# Altium PCB Project.PcbDoc (part 4 of 5)
Units mm, origin at the board's own origin, x right, y up, seen from the top; angles counter-clockwise.
Board outline 95 x 65 mm, 6 copper layers (Top Layer, L2 - GND, L3 - PWR, L4 - Sig, L5 - GND, Bottom Layer), stack 1.538 mm thick; 346 components, 317 nets, 1244 pads, 645 vias.
Unrouted connection lines stored in the file: 109.
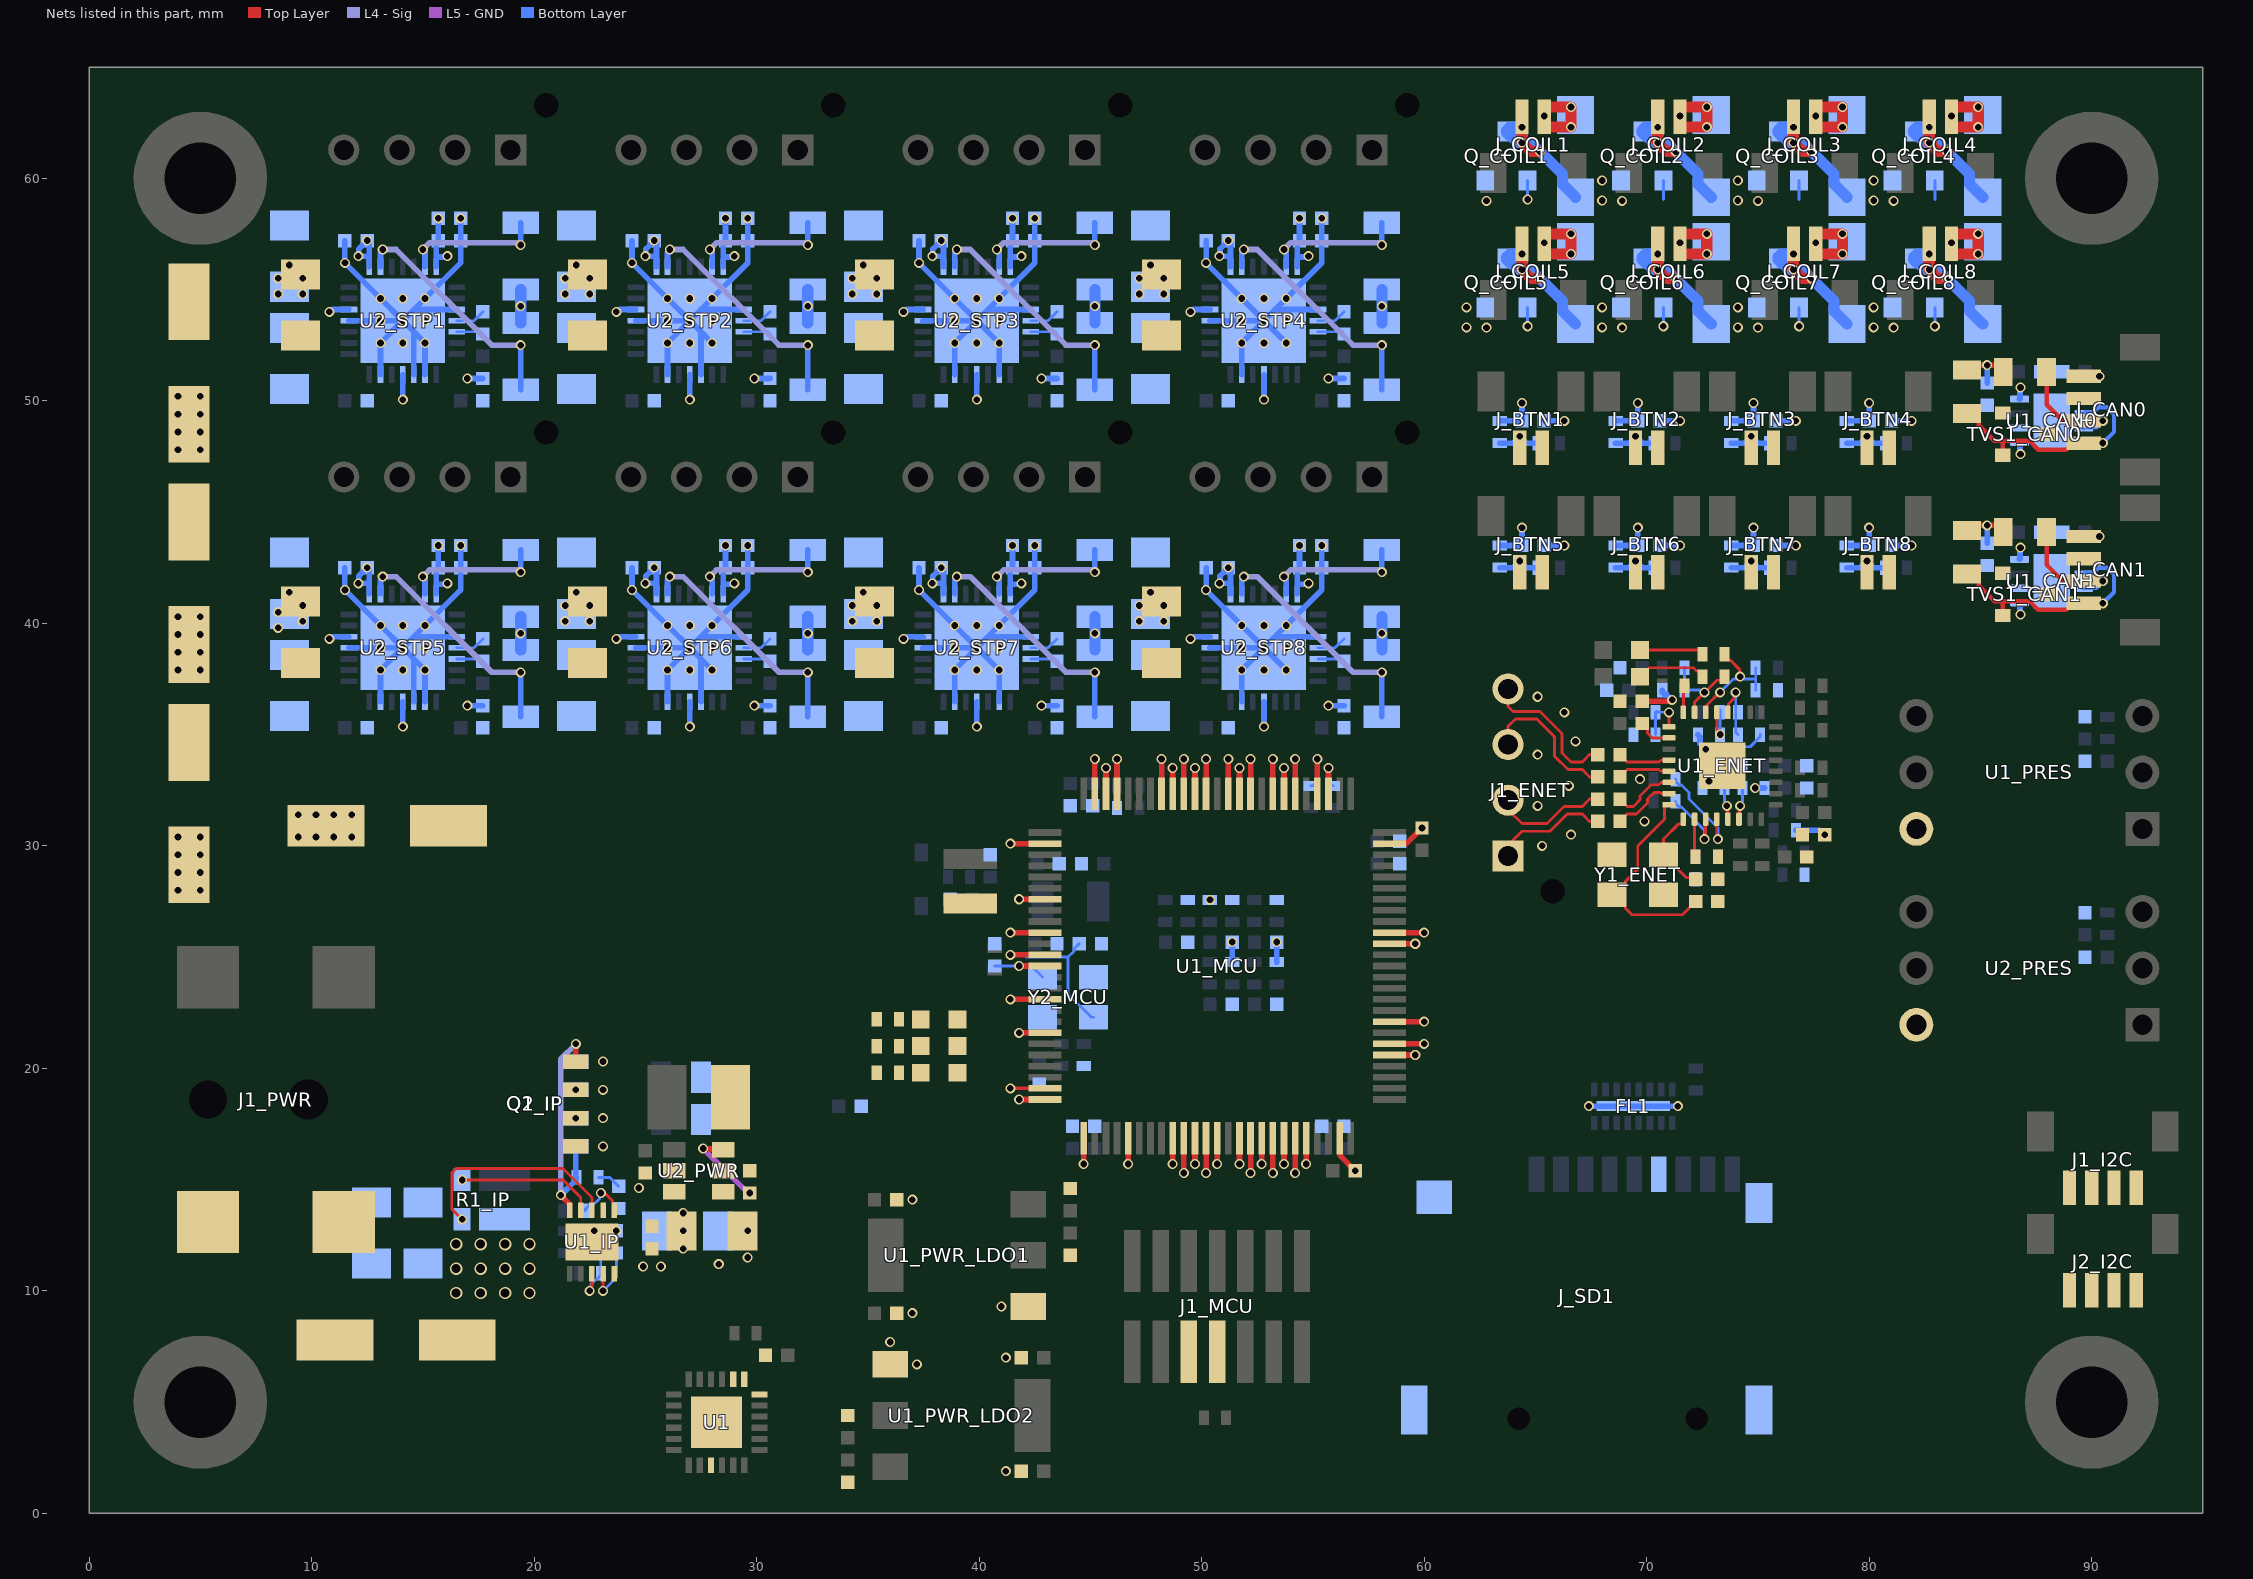
[diagram p6: the nets of this part, all layers, seen from the top]

## Via types
v1: diameter 0.45, hole 0.3, Top Layer to Bottom Layer, tented both sides, 633 vias
v2: diameter 0.55, hole 0.4, Top Layer to Bottom Layer, tented both sides, 12 vias

## Nets (pads, with @x,y where several pads share a name; then routed paths per layer and width w, separated by ;. In a path a pad name is that pad's centre, name@x,y a point inside that pad or via, vN(x,y) a via of type N, cw(c..) or ccw(c..) an arc to the next point about the centre after c; other vN are vias at no path point) (continued)
24V_MAIN: C1_IP.1 C1_STP1.2 C1_STP2.2 C1_STP3.2 C1_STP4.2 C1_STP5.2 C1_STP6.2 C1_STP7.2 C1_STP8.2 C2_IP.2 C2_STP1.2 C2_STP2.2 C2_STP3.2 C2_STP4.2 C2_STP5.2 C2_STP6.2 C2_STP7.2 C2_STP8.2 C3_IP.2 C3_STP1.2 C3_STP2.2 C3_STP3.2 C3_STP4.2 C3_STP5.2 C3_STP6.2 C3_STP7.2 C3_STP8.2 C4_STP1.2 C4_STP2.2 C4_STP3.2 C4_STP4.2 C4_STP5.2 C4_STP6.2 C4_STP7.2 C4_STP8.2 C8_STP1.2 C8_STP2.2 C8_STP3.2 C8_STP4.2 C8_STP5.2 C8_STP6.2 C8_STP7.2 C8_STP8.2 C9_PWR.1 C9_STP1.2 C9_STP2.2 C9_STP3.2 C9_STP4.2 C9_STP5.2 C9_STP6.2 C9_STP7.2 C9_STP8.2 C10_PWR.2 C10_STP1.2 C10_STP2.2 C10_STP3.2 C10_STP4.2 C10_STP5.2 C10_STP6.2 C10_STP7.2 C10_STP8.2 C11_PWR.2 C17_PWR.1 C18_PWR.1 C19_PWR.1 C20_PWR.1 D_COIL1.1 D_COIL2.1 D_COIL3.1 D_COIL4.1 D_COIL5.1 D_COIL6.1 D_COIL7.1 D_COIL8.1 J1_I2C.1 J2_I2C.1 J_CAN0.1 J_CAN1.1 J_COIL1.1 J_COIL2.1 J_COIL3.1 J_COIL4.1 J_COIL5.1 J_COIL6.1 J_COIL7.1 J_COIL8.1 R1_IP.2 R2_PWR.2 U2_PWR.2 U2_PWR.3 U2_STP1.22 U2_STP1.28 U2_STP2.22 U2_STP2.28 U2_STP3.22 U2_STP3.28 U2_STP4.22 U2_STP4.28 U2_STP5.22 U2_STP5.28 U2_STP6.22 U2_STP6.28 U2_STP7.22 U2_STP7.28 U2_STP8.22 U2_STP8.28 | length 81.8
  Top Layer w0.127: J_CAN0.1@89.637,51.1 v1(90.352,51.1)
  Top Layer w0.5: J_COIL5.1@65.4,56.65 65.4,57.45 65.45,57.5 v1(66.6,57.5) v1(66.6,56.6) 65.45,56.6 J_COIL5.1@65.4,56.65 ; J_COIL1.1@65.4,62.35 65.45,62.3 v1(66.6,62.3) v1(66.6,63.2) 65.45,63.2 65.4,63.15 J_COIL1.1@65.4,62.35 ; J_COIL6.1@71.5,56.65 71.55,56.6 v1(72.7,56.6) v1(72.7,57.5) 71.55,57.5 71.5,57.45 J_COIL6.1@71.5,56.65 ; J_COIL2.1@71.5,62.35 71.55,62.3 v1(72.7,62.3) v1(72.7,63.2) 71.55,63.2 71.5,63.15 J_COIL2.1@71.5,62.35 ; J_COIL7.1@77.6,56.65 77.6,57.45 77.65,57.5 v1(78.8,57.5) v1(78.8,56.6) 77.65,56.6 J_COIL7.1@77.6,56.65 ; J_COIL3.1@77.6,62.35 77.6,63.15 77.65,63.2 v1(78.8,63.2) v1(78.8,62.3) 77.65,62.3 J_COIL3.1@77.6,62.35 ; J_COIL8.1@83.7,56.65 83.75,56.6 v1(84.9,56.6) v1(84.9,57.5) 83.75,57.5 83.7,57.45 J_COIL8.1@83.7,56.65 ; J_COIL4.1@83.7,62.35 83.7,63.15 83.75,63.2 v1(84.9,63.2) v1(84.9,62.3) 83.75,62.3 J_COIL4.1@83.7,62.35
  Bottom Layer w0.254: v1(12.1,41.8) 12.6,41.8 ; v1@12.1,41.82 12.125,41.844 12.125,42.125 v1(12.5,42.5) 12.6,42.4 12.6,41.8 ; v1(12.1,56.5) 12.6,56.5 ; v1@12.1,56.52 12.125,56.544 12.125,56.825 v1(12.5,57.2) 12.6,57.1 12.6,56.5 ; U2_STP5.22@12.6,41.323 12.6,41.8 ; U2_STP1.22@12.6,56.023 12.6,56.5 ; U2_STP5.28@15.6,41.323 15.6,41.763 ; U2_STP1.28@15.6,56.023 15.6,56.463 ; v1(15.7,43.5) C2_STP5.2@15.7,42.5 15.6,42.4 15.6,41.763 ; v1(15.7,58.2) C2_STP1.2@15.7,57.2 15.6,57.1 15.6,56.463 ; v1(16.1,41.8) 16.063,41.763 15.6,41.763 ; v1(16.1,56.5) 16.063,56.463 15.6,56.463 ; v1(17,36.3) C4_STP5.2@17.7,36.3 ; v1(17,51) C4_STP1.2@17.7,51 ; v1(25,41.8) 25.5,41.8 ; v1@25,41.82 25.025,41.844 25.025,42.125 v1(25.4,42.5) 25.5,42.4 25.5,41.8 ; v1(25,56.5) 25.5,56.5 ; v1@25,56.52 25.025,56.544 25.025,56.825 v1(25.4,57.2) 25.5,57.1 25.5,56.5 ; U2_STP6.22@25.5,41.323 25.5,41.8 ; U2_STP2.22@25.5,56.023 25.5,56.5 ; U2_STP6.28@28.5,41.323 28.5,41.763 ; U2_STP2.28@28.5,56.023 28.5,56.463 ; v1(28.6,43.5) C2_STP6.2@28.6,42.5 28.5,42.4 28.5,41.763 ; v1(28.6,58.2) C2_STP2.2@28.6,57.2 28.5,57.1 28.5,56.463 ; v1(29,41.8) 28.963,41.763 28.5,41.763 ; v1(29,56.5) 28.963,56.463 28.5,56.463 ; v1(29.9,36.3) C4_STP6.2@30.6,36.3 ; v1(29.9,51) C4_STP2.2@30.6,51 ; v1(37.9,41.8) 38.4,41.8 ; v1@37.9,41.82 37.925,41.844 37.925,42.125 v1(38.3,42.5) 38.4,42.4 38.4,41.8 ; v1(37.9,56.5) 38.4,56.5 ; v1@37.9,56.52 37.925,56.544 37.925,56.825 v1(38.3,57.2) 38.4,57.1 38.4,56.5 ; U2_STP7.22@38.4,41.323 38.4,41.8 ; U2_STP3.22@38.4,56.023 38.4,56.5 ; U2_STP7.28@41.4,41.323 41.4,41.763 ; U2_STP3.28@41.4,56.023 41.4,56.463 ; v1(41.5,43.5) C2_STP7.2@41.5,42.5 41.4,42.4 41.4,41.763 ; v1(41.5,58.2) C2_STP3.2@41.5,57.2 41.4,57.1 41.4,56.463 ; v1(41.9,41.8) 41.863,41.763 41.4,41.763 ; v1(41.9,56.5) 41.863,56.463 41.4,56.463 ; v1(42.8,36.3) C4_STP7.2@43.5,36.3 ; v1(42.8,51) C4_STP3.2@43.5,51 ; v1(50.8,41.8) 51.3,41.8 ; v1@50.8,41.82 50.825,41.844 50.825,42.125 v1(51.2,42.5) 51.3,42.4 51.3,41.8 ; v1(50.8,56.5) 51.3,56.5 ; v1@50.8,56.52 50.825,56.544 50.825,56.825 v1(51.2,57.2) 51.3,57.1 51.3,56.5 ; U2_STP8.22@51.3,41.323 51.3,41.8 ; U2_STP4.22@51.3,56.023 51.3,56.5 ; U2_STP8.28@54.3,41.323 54.3,41.763 ; U2_STP4.28@54.3,56.023 54.3,56.463 ; v1(54.4,43.5) C2_STP8.2@54.4,42.5 54.3,42.4 54.3,41.763 ; v1(54.4,58.2) C2_STP4.2@54.4,57.2 54.3,57.1 54.3,56.463 ; v1(54.8,41.8) 54.763,41.763 54.3,41.763 ; v1(54.8,56.5) 54.763,56.463 54.3,56.463 ; v1(55.7,36.3) C4_STP8.2@56.4,36.3 ; v1(55.7,51) C4_STP4.2@56.4,51
  other v1: 26.7,11.9 26.7,12.7 26.7,13.5 50.375,27.575 4,28 5,28 4,28.8 5,28.8 4,29.6 5,29.6 4,30.4 5,30.4 9.4,30.4 10.2,30.4 11,30.4 11.8,30.4 9.4,31.4 10.2,31.4 11,31.4 11.8,31.4 4,37.9 5,37.9 4,38.7 5,38.7 4,39.5 5,39.5 8.5,39.8 9.6,40.1 21.4,40.1 22.5,40.1 34.3,40.1 35.4,40.1 47.2,40.1 48.3,40.1 4,40.3 5,40.3 8.5,40.5 9.6,40.8 21.4,40.8 22.5,40.8 34.3,40.8 35.4,40.8 47.2,40.8 48.3,40.8 9,41.4 21.9,41.4 34.8,41.4 47.7,41.4 90.352,43.9 4,47.8 5,47.8 4,48.6 5,48.6 4,49.4 5,49.4 4,50.2 5,50.2 8.5,54.8 9.6,54.8 21.4,54.8 22.5,54.8 34.3,54.8 35.4,54.8 47.2,54.8 48.3,54.8 8.5,55.5 9.6,55.5 21.4,55.5 22.5,55.5 34.3,55.5 35.4,55.5 47.2,55.5 48.3,55.5 9,56.1 21.9,56.1 34.8,56.1 47.7,56.1 65.4,57.1 71.5,57.1 77.6,57.1 83.7,57.1 65.4,62.8 71.5,62.8 77.6,62.8 83.7,62.8
  other v2: 16.5,9.9 17.6,9.9 18.7,9.9 19.8,9.9 16.5,11 17.6,11 18.7,11 19.8,11 16.5,12.1 17.6,12.1 18.7,12.1 19.8,12.1
ALARM_X: U1_MCU.44 | length 1.2
  Top Layer w0.254: v1(53.7,15.7) U1_MCU.44@53.7,16.862
ALARM_Y: U1_MCU.45 | length 1.6
  Top Layer w0.254: v1(54.2,15.3) U1_MCU.45@54.2,16.862
BRA_STP1: R1_STP1.1 U2_STP1.23 | length 10.8
  L4 - Sig w0.254: v1(13.2,56.8) 13.8,56.8 18.1,52.5 v1(19.4,52.5)
  Bottom Layer w0.254: U2_STP1.23@13.1,56.023 13.1,56.647 13.2,56.747 v1(13.2,56.8) ; R1_STP1.1@19.4,50.5 v1(19.4,52.5)
BRA_STP2: R1_STP2.1 U2_STP2.23 | length 10.8
  L4 - Sig w0.254: v1(26.1,56.8) 26.7,56.8 31,52.5 v1(32.3,52.5)
  Bottom Layer w0.254: U2_STP2.23@26,56.023 26,56.647 26.1,56.747 v1(26.1,56.8) ; R1_STP2.1@32.3,50.5 v1(32.3,52.5)
BRA_STP3: R1_STP3.1 U2_STP3.23 | length 10.8
  L4 - Sig w0.254: v1(39,56.8) 39.6,56.8 43.9,52.5 v1(45.2,52.5)
  Bottom Layer w0.254: U2_STP3.23@38.9,56.023 38.9,56.647 39,56.747 v1(39,56.8) ; R1_STP3.1@45.2,50.5 v1(45.2,52.5)
BRA_STP4: R1_STP4.1 U2_STP4.23 | length 10.8
  L4 - Sig w0.254: v1(51.9,56.8) 52.5,56.8 56.8,52.5 v1(58.1,52.5)
  Bottom Layer w0.254: U2_STP4.23@51.8,56.023 51.8,56.647 51.9,56.747 v1(51.9,56.8) ; R1_STP4.1@58.1,50.5 v1(58.1,52.5)
BRA_STP5: R1_STP5.1 U2_STP5.23 | length 10.8
  L4 - Sig w0.254: v1(13.2,42.1) 13.8,42.1 18.1,37.8 v1(19.4,37.8)
  Bottom Layer w0.254: U2_STP5.23@13.1,41.323 13.1,41.947 13.2,42.047 v1(13.2,42.1) ; R1_STP5.1@19.4,35.8 v1(19.4,37.8)
BRA_STP6: R1_STP6.1 U2_STP6.23 | length 10.8
  L4 - Sig w0.254: v1(26.1,42.1) 26.7,42.1 31,37.8 v1(32.3,37.8)
  Bottom Layer w0.254: U2_STP6.23@26,41.323 26,41.947 26.1,42.047 v1(26.1,42.1) ; R1_STP6.1@32.3,35.8 v1(32.3,37.8)
BRA_STP7: R1_STP7.1 U2_STP7.23 | length 10.8
  L4 - Sig w0.254: v1(39,42.1) 39.6,42.1 43.9,37.8 v1(45.2,37.8)
  Bottom Layer w0.254: U2_STP7.23@38.9,41.323 38.9,41.947 39,42.047 v1(39,42.1) ; R1_STP7.1@45.2,35.8 v1(45.2,37.8)
BRA_STP8: R1_STP8.1 U2_STP8.23 | length 10.8
  L4 - Sig w0.254: v1(51.9,42.1) 52.5,42.1 56.8,37.8 v1(58.1,37.8)
  Bottom Layer w0.254: U2_STP8.23@51.8,41.323 51.8,41.947 51.9,42.047 v1(51.9,42.1) ; R1_STP8.1@58.1,35.8 v1(58.1,37.8)
BRB_STP1: R2_STP1.1 U2_STP1.27 | length 6.4
  L4 - Sig w0.254: v1(15,56.8) 15.3,57.1 19.247,57.1 19.347,57 v1(19.4,57)
  Bottom Layer w0.254: v1(15,56.8) 15,56.747 15.1,56.647 U2_STP1.27@15.1,56.023 ; v1(19.4,57) R2_STP1.1@19.4,58
BRB_STP2: R2_STP2.1 U2_STP2.27 | length 6.4
  L4 - Sig w0.254: v1(27.9,56.8) 28.2,57.1 32.147,57.1 32.247,57 v1(32.3,57)
  Bottom Layer w0.254: v1(27.9,56.8) 27.9,56.747 28,56.647 U2_STP2.27@28,56.023 ; v1(32.3,57) R2_STP2.1@32.3,58
BRB_STP3: R2_STP3.1 U2_STP3.27 | length 6.4
  L4 - Sig w0.254: v1(40.8,56.8) 41.1,57.1 45.047,57.1 45.147,57 v1(45.2,57)
  Bottom Layer w0.254: v1(40.8,56.8) 40.8,56.747 40.9,56.647 U2_STP3.27@40.9,56.023 ; v1(45.2,57) R2_STP3.1@45.2,58
BRB_STP4: R2_STP4.1 U2_STP4.27 | length 6.4
  L4 - Sig w0.254: v1(53.7,56.8) 54,57.1 57.947,57.1 58.047,57 v1(58.1,57)
  Bottom Layer w0.254: v1(53.7,56.8) 53.7,56.747 53.8,56.647 U2_STP4.27@53.8,56.023 ; v1(58.1,57) R2_STP4.1@58.1,58
BRB_STP5: R2_STP5.1 U2_STP5.27 | length 6.4
  L4 - Sig w0.254: v1(15,42.1) 15.3,42.4 19.247,42.4 19.347,42.3 v1(19.4,42.3)
  Bottom Layer w0.254: v1(15,42.1) 15,42.047 15.1,41.947 U2_STP5.27@15.1,41.323 ; v1(19.4,42.3) R2_STP5.1@19.4,43.3
BRB_STP6: R2_STP6.1 U2_STP6.27 | length 6.4
  L4 - Sig w0.254: v1(27.9,42.1) 28.2,42.4 32.147,42.4 32.247,42.3 v1(32.3,42.3)
  Bottom Layer w0.254: v1(27.9,42.1) 27.9,42.047 28,41.947 U2_STP6.27@28,41.323 ; v1(32.3,42.3) R2_STP6.1@32.3,43.3
BRB_STP7: R2_STP7.1 U2_STP7.27 | length 6.4
  L4 - Sig w0.254: v1(40.8,42.1) 41.1,42.4 45.047,42.4 45.147,42.3 v1(45.2,42.3)
  Bottom Layer w0.254: v1(40.8,42.1) 40.8,42.047 40.9,41.947 U2_STP7.27@40.9,41.323 ; v1(45.2,42.3) R2_STP7.1@45.2,43.3
BRB_STP8: R2_STP8.1 U2_STP8.27 | length 6.4
  L4 - Sig w0.254: v1(53.7,42.1) 54,42.4 57.947,42.4 58.047,42.3 v1(58.1,42.3)
  Bottom Layer w0.254: v1(53.7,42.1) 53.7,42.047 53.8,41.947 U2_STP8.27@53.8,41.323 ; v1(58.1,42.3) R2_STP8.1@58.1,43.3
BTN1: C1_BTN1.2 R2_BTN1.1 | length 1.8
  Bottom Layer w0.254: R2_BTN1.1@63.4,49.1 C1_BTN1.2@64.4,49.1 v1(64.4,49.9)
BTN2: C1_BTN2.2 R2_BTN2.1 | length 1.8
  Bottom Layer w0.254: R2_BTN2.1@68.6,49.1 C1_BTN2.2@69.6,49.1 v1(69.6,49.9)
BTN3: C1_BTN3.2 R2_BTN3.1 | length 1.8
  Bottom Layer w0.254: R2_BTN3.1@73.8,49.1 C1_BTN3.2@74.8,49.1 v1(74.8,49.9)
BTN4: C1_BTN4.2 R2_BTN4.1 | length 1.8
  Bottom Layer w0.254: R2_BTN4.1@79,49.1 C1_BTN4.2@80,49.1 v1(80,49.9)
BTN5: C1_BTN5.2 R2_BTN5.1 | length 1.8
  Bottom Layer w0.254: R2_BTN5.1@63.4,43.5 C1_BTN5.2@64.4,43.5 v1(64.4,44.3)
BTN6: C1_BTN6.2 R2_BTN6.1 | length 1.8
  Bottom Layer w0.254: R2_BTN6.1@68.6,43.5 C1_BTN6.2@69.6,43.5 v1(69.6,44.3)
BTN7: C1_BTN7.2 R2_BTN7.1 | length 1.8
  Bottom Layer w0.254: R2_BTN7.1@73.8,43.5 C1_BTN7.2@74.8,43.5 v1(74.8,44.3)
BTN8: C1_BTN8.2 R2_BTN8.1 | length 1.8
  Bottom Layer w0.254: R2_BTN8.1@79,43.5 C1_BTN8.2@80,43.5 v1(80,44.3)
BTN_R_BTN1: J_BTN1.1 R1_BTN1.1 R2_BTN1.2 | length 1.9
  Bottom Layer w0.254: R2_BTN1.2@63.4,48.1 64,48.1 v1(64.3,48.4) 64.6,48.1 R1_BTN1.1@65.1,48.1
BTN_R_BTN2: J_BTN2.1 R1_BTN2.1 R2_BTN2.2 | length 1.9
  Bottom Layer w0.254: R2_BTN2.2@68.6,48.1 69.2,48.1 v1(69.5,48.4) 69.8,48.1 R1_BTN2.1@70.3,48.1
BTN_R_BTN3: J_BTN3.1 R1_BTN3.1 R2_BTN3.2 | length 1.9
  Bottom Layer w0.254: R2_BTN3.2@73.8,48.1 74.4,48.1 v1(74.7,48.4) 75,48.1 R1_BTN3.1@75.5,48.1
BTN_R_BTN4: J_BTN4.1 R1_BTN4.1 R2_BTN4.2 | length 1.9
  Bottom Layer w0.254: R2_BTN4.2@79,48.1 79.6,48.1 v1(79.9,48.4) 80.2,48.1 R1_BTN4.1@80.7,48.1
BTN_R_BTN5: J_BTN5.1 R1_BTN5.1 R2_BTN5.2 | length 1.9
  Bottom Layer w0.254: R2_BTN5.2@63.4,42.5 64,42.5 v1(64.3,42.8) 64.6,42.5 R1_BTN5.1@65.1,42.5
BTN_R_BTN6: J_BTN6.1 R1_BTN6.1 R2_BTN6.2 | length 1.9
  Bottom Layer w0.254: R2_BTN6.2@68.6,42.5 69.2,42.5 v1(69.5,42.8) 69.8,42.5 R1_BTN6.1@70.3,42.5
BTN_R_BTN7: J_BTN7.1 R1_BTN7.1 R2_BTN7.2 | length 1.9
  Bottom Layer w0.254: R2_BTN7.2@73.8,42.5 74.4,42.5 v1(74.7,42.8) 75,42.5 R1_BTN7.1@75.5,42.5
BTN_R_BTN8: J_BTN8.1 R1_BTN8.1 R2_BTN8.2 | length 1.9
  Bottom Layer w0.254: R2_BTN8.2@79,42.5 79.6,42.5 v1(79.9,42.8) 80.2,42.5 R1_BTN8.1@80.7,42.5
BUCK_5V_BST: C5_PWR.2 U2_PWR.6 | length 3.8
  Top Layer w0.254: v1(27.6,16.4) 27.625,16.375 28.475,16.375 U2_PWR.6@28.5,16.35
  L5 - GND w0.254: v1(27.6,16.4) 29.562,14.438 29.662,14.438 v1(29.7,14.4)
BUCK_5V_SW: C5_PWR.1 L1_PWR.1 U2_PWR.5
CAN0_MCU_TO_PHY_DATA: U1_CAN0.1 U1_MCU.82 | length 1.7
  Top Layer w0.254: U1_MCU.82@53.7,32.338 v1(53.7,33.5)
  Bottom Layer w0.254: U1_CAN0.1@86.755,48.125 86.777,48.103 86.777,47.623 v1(86.8,47.6)
CAN0_PHY_TO_MCU_DATA: U1_CAN0.4 U1_MCU.81 | length 2.1
  Top Layer w0.254: U1_MCU.81@54.2,32.338 v1(54.2,33.9)
  Bottom Layer w0.254: U1_CAN0.4@86.755,50.075 86.777,50.097 86.777,50.577 v1(86.8,50.6)
CAN1_MCU_TO_PHY_DATA: U1_CAN1.1 U1_MCU.92 | length 1.7
  Top Layer w0.254: U1_MCU.92@48.7,32.338 v1(48.7,33.5)
  Bottom Layer w0.254: U1_CAN1.1@86.755,40.925 86.777,40.902 86.777,40.422 v1(86.8,40.4)
CAN1_PHY_TO_MCU_DATA: U1_CAN1.4 U1_MCU.91 | length 2.1
  Top Layer w0.254: U1_MCU.91@49.2,32.338 v1(49.2,33.9)
  Bottom Layer w0.254: U1_CAN1.4@86.755,42.875 86.777,42.897 86.777,43.377 v1(86.8,43.4)
CAN_CAN0_H: J_CAN0.3 R1_CAN0.2 TVS1_CAN0.1 U1_CAN0.7 | length 4.4
  Top Layer w0.2: R1_CAN0.2@87.975,51.3 87.975,49.825 88.68,49.12 89.617,49.12 J_CAN0.3@89.637,49.1
  Bottom Layer w0.2: U1_CAN0.7@89.645,48.775 89.67,48.8 90.2,48.8 v1(90.5,49.1)
CAN_CAN0_L: J_CAN0.4 R2_CAN0.1 TVS1_CAN0.2 U1_CAN0.6 | length 9.9
  Top Layer w0.2: R2_CAN0.1@84.4,49.425 84.6,49.425 84.925,49.1 84.925,48.9 85.625,48.2 86,48.2 ; TVS1_CAN0.2@86,47.55 86,48.2 ; J_CAN0.4@89.637,48.1 89.162,48.1 88.862,47.8 87.6,47.8 87.2,48.2 86,48.2
  Bottom Layer w0.2: U1_CAN0.6@89.645,49.425 89.705,49.485 90.085,49.485 90.3,49.7 90.7,49.7 91,49.4 91,48.6 v1(90.5,48.1)
CAN_CAN1_H: J_CAN1.3 R1_CAN1.2 TVS1_CAN1.1 U1_CAN1.7 | length 4.4
  Top Layer w0.2: R1_CAN1.2@87.975,44.1 87.975,42.625 88.68,41.92 89.617,41.92 J_CAN1.3@89.637,41.9
  Bottom Layer w0.2: U1_CAN1.7@89.645,41.575 89.67,41.6 90.2,41.6 v1(90.5,41.9)
CAN_CAN1_L: J_CAN1.4 R2_CAN1.1 TVS1_CAN1.2 U1_CAN1.6 | length 9.9
  Top Layer w0.2: R2_CAN1.1@84.4,42.225 84.6,42.225 84.925,41.9 84.925,41.7 85.625,41 86,41 ; TVS1_CAN1.2@86,40.35 86,41 ; J_CAN1.4@89.637,40.9 89.162,40.9 88.862,40.6 87.6,40.6 87.2,41 86,41
  Bottom Layer w0.2: U1_CAN1.6@89.645,42.225 89.705,42.285 90.085,42.285 90.3,42.5 90.7,42.5 91,42.2 91,41.4 v1(90.5,40.9)
CAN_TERM_CAN0: C3_CAN0.2 R1_CAN0.1 R2_CAN0.2 | length 2.6
  Top Layer w0.254: R2_CAN0.2@84.4,51.375 84.625,51.6 v1(85.3,51.6) 85.727,51.6 86.025,51.302 R1_CAN0.1@86.025,51.3
  Bottom Layer w0.254: C3_CAN0.2@85.3,50.8 v1(85.3,51.6)
CAN_TERM_CAN1: C3_CAN1.2 R1_CAN1.1 R2_CAN1.2 | length 2.6
  Top Layer w0.254: R2_CAN1.2@84.4,44.175 84.625,44.4 v1(85.3,44.4) 85.727,44.4 86.025,44.102 R1_CAN1.1@86.025,44.1
  Bottom Layer w0.254: C3_CAN1.2@85.3,43.6 v1(85.3,44.4)
CLK_25M_MCU_XI: C5_MCU.2 U1_MCU.12 Y2_MCU.1 | length 8.2
  Top Layer w0.254: v1(41.4,25.1) U1_MCU.12@42.962,25.1
  Bottom Layer w0.127: v1(41.4,25.1) 42,25.1 42.1,25 44,25 ; C5_MCU.2@44.5,25.6 44.264,25.364 44.264,25.263 44,25 ; Y2_MCU.1@45.15,22.3 45.05,22.3 44,23.35 44,25
CLK_25M_MCU_XO: C4_MCU.2 U1_MCU.13 Y2_MCU.3 | length 3.5
  Top Layer w0.254: v1(41.8,24.6) U1_MCU.13@42.962,24.6
  Bottom Layer w0.127: C4_MCU.2@40.7,24.6 v1(41.8,24.6) 42.189,24.6 42.203,24.587 42.363,24.587 Y2_MCU.3@42.85,24.1
COIL_EN1: Q_COIL1.1 | length 0.9
  Bottom Layer w0.127: v1(64.65,59.05) Q_COIL1.1@64.65,59.9
COIL_EN2: Q_COIL2.1 | length 0.9
  Bottom Layer w0.127: 70.75,59.05 Q_COIL2.1@70.75,59.9
COIL_EN3: Q_COIL3.1 | length 0.9
  Bottom Layer w0.127: 76.85,59.05 Q_COIL3.1@76.85,59.9
COIL_EN4: Q_COIL4.1 | length 0.9
  Bottom Layer w0.127: 82.95,59.05 Q_COIL4.1@82.95,59.9
COIL_EN5: Q_COIL5.1 | length 0.9
  Bottom Layer w0.127: v1(64.65,53.35) Q_COIL5.1@64.65,54.2
COIL_EN6: Q_COIL6.1 | length 0.9
  Bottom Layer w0.127: v1(70.75,53.35) Q_COIL6.1@70.75,54.2
COIL_EN7: Q_COIL7.1 | length 0.9
  Bottom Layer w0.127: v1(76.85,53.35) Q_COIL7.1@76.85,54.2
COIL_EN8: Q_COIL8.1 | length 0.9
  Bottom Layer w0.127: v1(82.95,53.35) Q_COIL8.1@82.95,54.2
COIL_LO_COIL1: D_COIL1.2 J_COIL1.2 Q_COIL1.3 | length 8.3
  Top Layer w0.254: v1(64.4,62.3) J_COIL1.2@64.4,62.763
  Top Layer w0.5: v1(64.4,62.3) v1(64.4,61.6) 64.8,61.2 v1(65.2,61.2)
  Bottom Layer w0.5: D_COIL1.2@66.8,59.15 66.21,59.74 66.21,60.19 v1(65.2,61.2) 64.8,61.6 v1(64.4,61.6) ; v1(64.4,61.6) 64.2,61.6 63.9,61.9 63.85,61.9 63.7,62.05 Q_COIL1.3@63.7,62.1 63.7,62.15 63.85,62.3 v1(64.4,62.3) v1(64.4,61.6)
COIL_LO_COIL2: D_COIL2.2 J_COIL2.2 Q_COIL2.3 | length 8.3
  Top Layer w0.254: v1(70.5,62.3) J_COIL2.2@70.5,62.762
  Top Layer w0.5: v1(70.5,62.3) v1(70.5,61.6) 70.9,61.2 v1(71.3,61.2)
  Bottom Layer w0.5: D_COIL2.2@72.9,59.15 72.31,59.74 72.31,60.19 v1(71.3,61.2) 70.9,61.6 v1(70.5,61.6) ; v1(70.5,61.6) v1(70.5,62.3) 69.95,62.3 69.8,62.15 Q_COIL2.3@69.8,62.1 69.8,62.05 69.95,61.9 70,61.9 70.3,61.6 v1(70.5,61.6)
COIL_LO_COIL3: D_COIL3.2 J_COIL3.2 Q_COIL3.3 | length 8.3
  Top Layer w0.254: v1(76.6,62.3) J_COIL3.2@76.6,62.763
  Top Layer w0.5: v1(76.6,62.3) v1(76.6,61.6) 77,61.2 v1(77.4,61.2)
  Bottom Layer w0.5: D_COIL3.2@79,59.15 78.41,59.74 78.41,60.19 v1(77.4,61.2) 77,61.6 v1(76.6,61.6) ; v1(76.6,61.6) v1(76.6,62.3) 76.05,62.3 75.9,62.15 Q_COIL3.3@75.9,62.1 75.9,62.05 76.05,61.9 76.1,61.9 76.4,61.6 v1(76.6,61.6)
COIL_LO_COIL4: D_COIL4.2 J_COIL4.2 Q_COIL4.3 | length 8.3
  Top Layer w0.254: v1(82.7,62.3) J_COIL4.2@82.7,62.763
  Top Layer w0.5: v1(82.7,62.3) v1(82.7,61.6) 83.1,61.2 v1(83.5,61.2)
  Bottom Layer w0.5: D_COIL4.2@85.1,59.15 84.51,59.74 84.51,60.19 v1(83.5,61.2) 83.1,61.6 v1(82.7,61.6) ; v1(82.7,61.6) v1(82.7,62.3) 82.15,62.3 82,62.15 Q_COIL4.3@82,62.1 82,62.05 82.15,61.9 82.2,61.9 82.5,61.6 v1(82.7,61.6)
COIL_LO_COIL5: D_COIL5.2 J_COIL5.2 Q_COIL5.3 | length 8.3
  Top Layer w0.254: v1(64.4,56.6) J_COIL5.2@64.4,57.063
  Top Layer w0.5: v1(64.4,56.6) v1(64.4,55.9) 64.8,55.5 v1(65.2,55.5)
  Bottom Layer w0.5: D_COIL5.2@66.8,53.45 66.21,54.04 66.21,54.49 v1(65.2,55.5) 64.8,55.9 v1(64.4,55.9) ; v1(64.4,55.9) v1(64.4,56.6) 63.85,56.6 63.7,56.45 Q_COIL5.3@63.7,56.4 63.7,56.35 63.85,56.2 63.9,56.2 64.2,55.9 v1(64.4,55.9)
COIL_LO_COIL6: D_COIL6.2 J_COIL6.2 Q_COIL6.3 | length 8.3
  Top Layer w0.254: v1(70.5,56.6) J_COIL6.2@70.5,57.063
  Top Layer w0.5: v1(70.5,56.6) v1(70.5,55.9) 70.9,55.5 v1(71.3,55.5)
  Bottom Layer w0.5: D_COIL6.2@72.9,53.45 72.31,54.04 72.31,54.49 v1(71.3,55.5) 70.9,55.9 v1(70.5,55.9) ; v1(70.5,55.9) v1(70.5,56.6) 69.95,56.6 69.8,56.45 Q_COIL6.3@69.8,56.4 69.8,56.35 69.95,56.2 70,56.2 70.3,55.9 v1(70.5,55.9)
COIL_LO_COIL7: D_COIL7.2 J_COIL7.2 Q_COIL7.3 | length 8.3
  Top Layer w0.254: v1(76.6,56.6) J_COIL7.2@76.6,57.063
  Top Layer w0.5: v1(76.6,56.6) v1(76.6,55.9) 77,55.5 v1(77.4,55.5)
  Bottom Layer w0.5: D_COIL7.2@79,53.45 78.41,54.04 78.41,54.49 v1(77.4,55.5) 77,55.9 v1(76.6,55.9) ; v1(76.6,55.9) v1(76.6,56.6) 76.05,56.6 75.9,56.45 Q_COIL7.3@75.9,56.4 75.9,56.35 76.05,56.2 76.1,56.2 76.4,55.9 v1(76.6,55.9)
COIL_LO_COIL8: D_COIL8.2 J_COIL8.2 Q_COIL8.3 | length 8.3
  Top Layer w0.254: v1(82.7,56.6) J_COIL8.2@82.7,57.063
  Top Layer w0.5: v1(82.7,56.6) v1(82.7,55.9) 83.1,55.5 v1(83.5,55.5)
  Bottom Layer w0.5: D_COIL8.2@85.1,53.45 84.51,54.04 84.51,54.49 v1(83.5,55.5) 83.1,55.9 v1(82.7,55.9) ; v1(82.7,55.9) v1(82.7,56.6) 82.15,56.6 82,56.45 Q_COIL8.3@82,56.4 82,56.35 82.15,56.2 82.2,56.2 82.5,55.9 v1(82.7,55.9)
CPI_STP1: C7_STP1.1 U2_STP1.5 | length 1.2
  Bottom Layer w0.127: U2_STP1.5@16.523,53.1 17.6,53.1 C7_STP1.1@17.7,53
CPI_STP2: C7_STP2.1 U2_STP2.5 | length 1.2
  Bottom Layer w0.127: U2_STP2.5@29.423,53.1 30.5,53.1 C7_STP2.1@30.6,53
CPI_STP3: C7_STP3.1 U2_STP3.5 | length 1.2
  Bottom Layer w0.127: U2_STP3.5@42.323,53.1 43.4,53.1 C7_STP3.1@43.5,53
CPI_STP4: C7_STP4.1 U2_STP4.5 | length 1.2
  Bottom Layer w0.127: U2_STP4.5@55.223,53.1 56.3,53.1 C7_STP4.1@56.4,53
CPI_STP5: C7_STP5.1 U2_STP5.5 | length 1.2
  Bottom Layer w0.127: U2_STP5.5@16.523,38.4 17.6,38.4 C7_STP5.1@17.7,38.3
CPI_STP6: C7_STP6.1 U2_STP6.5 | length 1.2
  Bottom Layer w0.127: U2_STP6.5@29.423,38.4 30.5,38.4 C7_STP6.1@30.6,38.3
CPI_STP7: C7_STP7.1 U2_STP7.5 | length 1.2
  Bottom Layer w0.127: U2_STP7.5@42.323,38.4 43.4,38.4 C7_STP7.1@43.5,38.3
CPI_STP8: C7_STP8.1 U2_STP8.5 | length 1.2
  Bottom Layer w0.127: U2_STP8.5@55.223,38.4 56.3,38.4 C7_STP8.1@56.4,38.3
CPO_STP1: C7_STP1.2 U2_STP1.4 | length 1.3
  Bottom Layer w0.127: U2_STP1.4@16.523,53.6 17.3,53.6 C7_STP1.2@17.7,54
CPO_STP2: C7_STP2.2 U2_STP2.4 | length 1.3
  Bottom Layer w0.127: U2_STP2.4@29.423,53.6 30.2,53.6 C7_STP2.2@30.6,54
CPO_STP3: C7_STP3.2 U2_STP3.4 | length 1.3
  Bottom Layer w0.127: U2_STP3.4@42.323,53.6 43.1,53.6 C7_STP3.2@43.5,54
CPO_STP4: C7_STP4.2 U2_STP4.4 | length 1.3
  Bottom Layer w0.127: U2_STP4.4@55.223,53.6 56,53.6 C7_STP4.2@56.4,54
CPO_STP5: C7_STP5.2 U2_STP5.4 | length 1.3
  Bottom Layer w0.127: U2_STP5.4@16.523,38.9 17.3,38.9 C7_STP5.2@17.7,39.3
CPO_STP6: C7_STP6.2 U2_STP6.4 | length 1.3
  Bottom Layer w0.127: U2_STP6.4@29.423,38.9 30.2,38.9 C7_STP6.2@30.6,39.3
CPO_STP7: C7_STP7.2 U2_STP7.4 | length 1.3
  Bottom Layer w0.127: U2_STP7.4@42.323,38.9 43.1,38.9 C7_STP7.2@43.5,39.3
CPO_STP8: C7_STP8.2 U2_STP8.4 | length 1.3
  Bottom Layer w0.127: U2_STP8.4@55.223,38.9 56,38.9 C7_STP8.2@56.4,39.3
DEBUG_LED_0: R10_MCU.1
DEBUG_LED_0_R: D2_MCU.2 R10_MCU.2
DEBUG_LED_1: R11_MCU.1
DEBUG_LED_1_R: D3_MCU.2 R11_MCU.2
DEBUG_LED_2: R12_MCU.1
DEBUG_LED_2_R: D4_MCU.2 R12_MCU.2
DIAG1: U2_STP1.11 | length 1.1
  Bottom Layer w0.254: v1(14.1,50.053) U2_STP1.11@14.1,51.177
DIAG2: U2_STP2.11 | length 1.1
  Bottom Layer w0.254: v1(27,50.053) U2_STP2.11@27,51.177
DIAG3: U2_STP3.11 | length 1.1
  Bottom Layer w0.254: v1(39.9,50.053) U2_STP3.11@39.9,51.177
DIAG4: U2_STP4.11 | length 1.1
  Bottom Layer w0.254: v1(52.8,50.053) U2_STP4.11@52.8,51.177
DIAG5: U2_STP5.11 | length 1.1
  Bottom Layer w0.254: v1(14.1,35.353) U2_STP5.11@14.1,36.477
DIAG6: U2_STP6.11 | length 1.1
  Bottom Layer w0.254: v1(27,35.353) U2_STP6.11@27,36.477
DIAG7: U2_STP7.11 | length 1.1
  Bottom Layer w0.254: v1(39.9,35.353) U2_STP7.11@39.9,36.477
DIAG8: U2_STP8.11 | length 1.1
  Bottom Layer w0.254: v1(52.8,35.353) U2_STP8.11@52.8,36.477
DIAG_AUX: U1_MCU.93 | length 1.6
  Top Layer w0.254: U1_MCU.93@48.2,32.338 v1(48.2,33.9)
DIAG_R1: U1_MCU.86 | length 1.2
  Top Layer w0.254: U1_MCU.86@51.7,32.338 v1(51.7,33.5)
DIAG_R2: U1_MCU.87 | length 1.6
  Top Layer w0.254: U1_MCU.87@51.2,32.338 v1(51.2,33.9)
DIAG_X: U1_MCU.34 | length 1.2
  Top Layer w0.254: v1(48.7,15.7) U1_MCU.34@48.7,16.862
DIAG_Y1: U1_MCU.35 | length 1.6
  Top Layer w0.254: v1(49.2,15.3) U1_MCU.35@49.2,16.862
DIAG_Y2: U1_MCU.36 | length 1.2
  Top Layer w0.254: v1(49.7,15.7) U1_MCU.36@49.7,16.862
DIAG_Z1: U1_MCU.89 | length 1.6
  Top Layer w0.254: U1_MCU.89@50.2,32.338 v1(50.2,33.9)
DIAG_Z2: U1_MCU.90 | length 1.2
  Top Layer w0.254: U1_MCU.90@49.7,32.338 v1(49.7,33.5)
DIR1: U2_STP1.19 | length 0.9
  Bottom Layer w0.254: v1(10.8,54) 10.853,54 10.953,54.1 U2_STP1.19@11.677,54.1
DIR2: U2_STP2.19 | length 0.9
  Bottom Layer w0.254: v1(23.7,54) 23.753,54 23.853,54.1 U2_STP2.19@24.577,54.1
DIR3: U2_STP3.19 | length 0.9
  Bottom Layer w0.254: v1(36.6,54) 36.653,54 36.753,54.1 U2_STP3.19@37.477,54.1
DIR4: U2_STP4.19 | length 0.9
  Bottom Layer w0.254: v1(49.5,54) 49.553,54 49.653,54.1 U2_STP4.19@50.377,54.1
DIR5: U2_STP5.19 | length 0.9
  Bottom Layer w0.254: v1(10.8,39.3) 10.853,39.3 10.953,39.4 U2_STP5.19@11.677,39.4
DIR6: U2_STP6.19 | length 0.9
  Bottom Layer w0.254: v1(23.7,39.3) 23.753,39.3 23.853,39.4 U2_STP6.19@24.577,39.4
DIR7: U2_STP7.19 | length 0.9
  Bottom Layer w0.254: v1(36.6,39.3) 36.653,39.3 36.753,39.4 U2_STP7.19@37.477,39.4
DIR8: U2_STP8.19 | length 0.9
  Bottom Layer w0.254: v1(49.5,39.3) 49.553,39.3 49.653,39.4 U2_STP8.19@50.377,39.4
DIR_AUX: U1_MCU.43 | length 1.6
  Top Layer w0.254: v1(53.2,15.3) U1_MCU.43@53.2,16.862
DIR_R1: U1_MCU.40 | length 1.2
  Top Layer w0.254: v1(51.7,15.7) U1_MCU.40@51.7,16.862
DIR_R2: U1_MCU.41 | length 1.6
  Top Layer w0.254: v1(52.2,15.3) U1_MCU.41@52.2,16.862
DIR_X: U1_MCU.97 | length 1.6
  Top Layer w0.254: U1_MCU.97@46.2,32.338 v1(46.2,33.9)
DIR_Y1: U1_MCU.98 | length 1.2
  Top Layer w0.254: U1_MCU.98@45.7,32.338 v1(45.7,33.5)
DIR_Y2: U1_MCU.2 | length 1.6
  Top Layer w0.254: v1(41.4,30.1) U1_MCU.2@42.962,30.1
DIR_Z1: U1_MCU.37 | length 1.6
  Top Layer w0.254: v1(50.2,15.3) U1_MCU.37@50.2,16.862
DIR_Z2: U1_MCU.38 | length 1.2
  Top Layer w0.254: v1(50.7,15.7) U1_MCU.38@50.7,16.862
ENET_100BASETX_RX_N: C8_ENET.1 J1_ENET.4 | length 6.5
  Top Layer w0.127: J1_ENET.4@63.775,37.05 63.775,36.267 64,36.042 65.2,36.042 66.2,35.042 66.2,34.171 66.6,33.771 67.107,33.771 67.436,34.1 C8_ENET.1@67.8,34.1
ENET_100BASETX_RX_P: C7_ENET.1 J1_ENET.3 | length 6.6
  Top Layer w0.127: J1_ENET.3@63.775,34.55 63.775,35.375 64.1,35.7 65.058,35.7 65.858,34.9 65.858,34.029 66.458,33.429 67.107,33.429 67.436,33.1 C7_ENET.1@67.8,33.1
ENET_100BASETX_TX_N: C2_ENET.1 J1_ENET.2 | length 5.2
  Top Layer w0.127: J1_ENET.2@63.775,32.05 63.775,31.625 64.4,31 65.516,31 66.287,31.771 67.107,31.771 67.436,32.1 C2_ENET.1@67.8,32.1
ENET_100BASETX_TX_P: C1_ENET.1 J1_ENET.1 | length 5.2
  Top Layer w0.127: J1_ENET.1@63.775,29.55 63.775,30.033 64.4,30.658 65.658,30.658 66.429,31.429 67.107,31.429 67.436,31.1 C1_ENET.1@67.8,31.1
ENET_100M_RD_N: C8_ENET.2 U1_ENET.4 | length 2.4
  Top Layer w0.127: C8_ENET.2@68.8,34.1 69.129,33.771 70.557,33.771 70.636,33.85 U1_ENET.4@71,33.85
ENET_100M_RD_P: C7_ENET.2 U1_ENET.5 | length 2.4
  Top Layer w0.127: C7_ENET.2@68.8,33.1 69.129,33.429 70.557,33.429 70.636,33.35 U1_ENET.5@71,33.35
ENET_100M_TD_N: C2_ENET.2 U1_ENET.6 | length 2.9
  Top Layer w0.127: C2_ENET.2@68.8,32.1 69.129,31.771 69.4,31.771 69.7,32.071 69.7,32.242 70.2,32.742 70.528,32.742 70.636,32.85 U1_ENET.6@71,32.85
ENET_100M_TD_P: C1_ENET.2 U1_ENET.7 | length 2.9
  Top Layer w0.127: C1_ENET.2@68.8,31.1 69.129,31.429 69.542,31.429 70.042,31.929 70.042,32.1 70.342,32.4 70.586,32.4 70.636,32.35 U1_ENET.7@71,32.35
ENET_CEXT: C15_ENET.2 U1_ENET.2 | length 1.6
  Top Layer w0.127: C15_ENET.2@69.8,35.5 70.036,35.264 70.036,35.064 70.25,34.85 U1_ENET.2@71,34.85
ENET_LED0: R8_ENET.1 R23_ENET.1 R33_ENET.2 U1_ENET.30 | length 5.4
  Top Layer w0.127: U1_ENET.30@72.65,36 72.711,36.062 72.711,36.328 73.284,36.9 v1(73.3,36.9) ; R8_ENET.1@73.5,38.6 73.5,38.5 73.661,38.338 73.761,38.338 74.183,37.917 74.183,37.617 v1(74.2,37.6)
  Bottom Layer w0.127: v1(73.3,36.9) 73.9,37.5 74.9,37.5 ; R33_ENET.2@74.9,37 74.9,37.5 ; R23_ENET.1@74.9,38 74.9,37.5
ENET_LED0_R: D1_ENET.1 R8_ENET.2 | length 2.9
  Top Layer w0.127: D1_ENET.1@69.7,38.8 72.338,38.8 72.5,38.638 R8_ENET.2@72.5,38.6
ENET_LED1: R11_ENET.1 R24_ENET.1 R34_ENET.2 U1_ENET.31 | length 4.2
  Top Layer w0.127: U1_ENET.31@72.15,36 72.15,36.45 v1(72.6,36.9) 72.619,36.9 73.159,37.439 73.339,37.439 R11_ENET.1@73.5,37.6
  Bottom Layer w0.127: R24_ENET.1@71.7,38 R34_ENET.2@71.7,37 72.413,37 72.513,36.9 v1(72.6,36.9)
ENET_LED1_R: D2_ENET.1 R11_ENET.2 | length 3.2
  Top Layer w0.127: D2_ENET.1@69.7,37.6 70.1,38 72.1,38 72.238,37.861 72.338,37.861 72.5,37.7 R11_ENET.2@72.5,37.6
ENET_LED2: R22_ENET.1 R32_ENET.2 U1_ENET.28 | length 3
  Top Layer w0.127: U1_ENET.28@73.65,36 73.681,36.031 73.681,36.381 73.938,36.638 73.938,36.838 v1(74,36.9)
  Bottom Layer w0.127: v1(74,36.9) 74,35.1 R32_ENET.2@74.1,35
ENET_LED3: R20_ENET.1 R30_ENET.2 U1_ENET.29 | length 2.2
  Top Layer w0.127: U1_ENET.29@73.181,36.031 U1_ENET.29@73.15,36 73.15,35.238 73.3,35.088 v1(73.3,35.002)
  Bottom Layer w0.127: R30_ENET.2@73.3,35 v1(73.3,35.002) R20_ENET.1@73.3,36 R20_ENET.1@73.3,36.1
ENET_MDC: R16_ENET.1 U1_ENET.12 U1_MCU.16 | length 6
  Top Layer w0.127: U1_ENET.12@73.15,31.2 73.15,30.35 v1(73.2,30.3)
  Top Layer w0.254: v1(41.4,23.1) U1_MCU.16@42.962,23.1
  Bottom Layer w0.127: R16_ENET.1@71.3,33 71.3,32.9 71.461,32.738 71.561,32.738 71.9,32.4 71.9,32.1 73.2,30.8 v1(73.2,30.3)
ENET_MDIO: R14_ENET.1 U1_ENET.11 U1_MCU.24 | length 4.8
  Top Layer w0.127: v1(72.6,30.3) 72.65,30.35 U1_ENET.11@72.65,31.2
  Top Layer w0.161: v1(41.4,19.1) U1_MCU.24@42.962,19.1
  Bottom Layer w0.127: R14_ENET.1@71.3,32 71.3,31.9 71.461,31.738 71.561,31.738 72.6,30.7 v1(72.6,30.3)
ENET_MODESELECT: R26_ENET.1 R36_ENET.2 U1_ENET.1 | length 2.3
  Top Layer w0.127: U1_ENET.1@71,35.35 v1(71,36)
  Bottom Layer w0.127: R36_ENET.2@70.4,35 R26_ENET.1@70.4,36 R26_ENET.1@70.45,36 ; R26_ENET.1@70.45,36.05 70.5,36 v1(71,36)
ENET_RBIAS: R12_ENET.2 U1_ENET.10 | length 1.7
  Top Layer w0.127: U1_ENET.10@72.15,31.2 72.15,29.55 R12_ENET.2@72.2,29.5
ENET_RST_L: R1_ENET.1 U1_ENET.32 | length 1.2
  Top Layer w0.127: U1_ENET.32@71.65,36 71.65,37.15 R1_ENET.1@71.7,37.2
ENET_STRAP7: R17_ENET.1 R27_ENET.2 U1_ENET.13 | length 2.5
  Top Layer w0.127: v1(73.6,31.8) 73.625,31.775 73.625,31.225 U1_ENET.13@73.65,31.2
  Bottom Layer w0.127: R17_ENET.1@73.5,33.6 73.5,31.987 73.6,31.887 v1(73.6,31.8)
ENET_STRAP8: R18_ENET.1 R28_ENET.2 U1_ENET.14 | length 2.5
  Top Layer w0.127: U1_ENET.14@74.15,31.2 74.175,31.225 74.175,31.775 v1(74.2,31.8)
  Bottom Layer w0.127: v1(74.2,31.8) 74.2,31.887 74.3,31.987 R18_ENET.1@74.3,33.6
ENET_XI_25MHZ_CLK: C13_ENET.2 U1_ENET.9 Y1_ENET.3 | length 4
  Top Layer w0.127: U1_ENET.9@71.65,31.2 71.65,31.056 71.588,30.994 71.444,30.994 70.75,30.3 Y1_ENET.3@70.75,29.6 70.85,29.6 71.336,29.113 71.336,29.014 71.784,28.566 72.134,28.566 C13_ENET.2@72.2,28.5
ENET_XO_25MHZ_CLK: C14_ENET.2 U1_ENET.8 Y1_ENET.1 | length 9.6
  Top Layer w0.127: Y1_ENET.1@68.45,27.8 Y1_ENET.1@68.55,27.8 ; U1_ENET.8@71,31.85 70.856,31.85 70.794,31.788 70.794,31.194 69.6,30 69.6,28.95 69.036,28.386 69.036,28.286 Y1_ENET.1@68.55,27.8 ; C14_ENET.2@72.2,27.5 71.6,26.9 69.35,26.9 69.036,27.213 69.036,27.313 Y1_ENET.1@68.55,27.8
ES_SPARE: U1_MCU.7 | length 1.2
  Top Layer w0.254: v1(41.8,27.6) U1_MCU.7@42.962,27.6
ES_X: U1_MCU.65 | length 1.2
  Top Layer w0.254: U1_MCU.65@58.438,25.6 v1(59.6,25.6)
ES_Y1: U1_MCU.66 | length 1.6
  Top Layer w0.254: U1_MCU.66@58.438,26.1 v1(60,26.1)
ES_Y2: U1_MCU.46 | length 1.2
  Top Layer w0.254: v1(54.7,15.7) U1_MCU.46@54.7,16.862
ES_Z1: U1_MCU.58 | length 1.6
  Top Layer w0.254: U1_MCU.58@58.438,22.1 v1(60,22.1)
ES_Z2: U1_MCU.42 | length 1.2
  Top Layer w0.254: v1(52.7,15.7) U1_MCU.42@52.7,16.862
ESP_EN: U1_MCU.83 | length 1.6
  Top Layer w0.254: U1_MCU.83@53.2,32.338 v1(53.2,33.9)
ESP_IO0: U1_MCU.85 | length 1.6
  Top Layer w0.254: U1_MCU.85@52.2,32.338 v1(52.2,33.9)
ESP_RX: U1_MCU.56 | length 1.6
  Top Layer w0.254: U1_MCU.56@58.438,21.1 v1(60,21.1)
ESP_TX: U1_MCU.55 | length 1.2
  Top Layer w0.254: U1_MCU.55@58.438,20.6 v1(59.6,20.6)
FAN_PWM: U1_MCU.30 | length 1.2
  Top Layer w0.254: v1(46.7,15.7) U1_MCU.30@46.7,16.862
FAN_TACH: U1_MCU.25 | length 1.2
  Top Layer w0.254: v1(41.8,18.6) U1_MCU.25@42.962,18.6
GND: B1_MCU.2 C1.1 C1_BTN1.1 C1_BTN2.1 C1_BTN3.1 C1_BTN4.1 C1_BTN5.1 C1_BTN6.1 C1_BTN7.1 C1_BTN8.1 C1_CAN0.2 C1_CAN1.2 C1_IP.2 C1_MCU.1 C1_PRES.1 C1_PWR_LDO1.1 C1_PWR_LDO2.1 C1_STP1.1 C1_STP2.1 C1_STP3.1 C1_STP4.1 C1_STP5.1 C1_STP6.1 C1_STP7.1 C1_STP8.1 C2_CAN0.2 C2_CAN1.2 C2_IP.1 C2_MCU.1 C2_PRES.1 C2_PWR_LDO1.1 C2_PWR_LDO2.1 C2_STP1.1 C2_STP2.1 C2_STP3.1 C2_STP4.1 C2_STP5.1 C2_STP6.1 C2_STP7.1 C2_STP8.1 C3_CAN0.1 C3_CAN1.1 C3_ENET.1 C3_IP.1 C3_MCU.1 C3_PRES.1 C3_PWR_LDO1.1 C3_PWR_LDO2.1 C3_STP1.1 C3_STP2.1 C3_STP3.1 C3_STP4.1 C3_STP5.1 C3_STP6.1 C3_STP7.1 C3_STP8.1 C4_ENET.1 C4_IP.1 C4_MCU.1 C4_PRES.1 C4_PWR_LDO1.1 C4_PWR_LDO2.1 C5_ENET.1 C5_IP.1 C5_MCU.1 C5_STP1.1 C5_STP2.1 C5_STP3.1 C5_STP4.1 C5_STP5.1 C5_STP6.1 C5_STP7.1 C5_STP8.1 C6_ENET.1 C6_PWR.1 C6_STP1.1 C6_STP2.1 C6_STP3.1 C6_STP4.1 C6_STP5.1 C6_STP6.1 C6_STP7.1 C6_STP8.1 C7_MCU.1 C7_PWR.1 C8_MCU.1 C8_PWR.1 C8_STP1.1 C8_STP2.1 C8_STP3.1 C8_STP4.1 C8_STP5.1 C8_STP6.1 C8_STP7.1 C8_STP8.1 C9_ENET.1 C9_MCU.1 C9_PWR.2 C9_STP1.1 C9_STP2.1 C9_STP3.1 C9_STP4.1 C9_STP5.1 C9_STP6.1 C9_STP7.1 C9_STP8.1 C10_ENET.1 C10_MCU.1 C10_PWR.1 C10_STP1.1 C10_STP2.1 C10_STP3.1 C10_STP4.1 C10_STP5.1 C10_STP6.1 C10_STP7.1 C10_STP8.1 C11_ENET.1 C11_MCU.1 C11_PWR.1 C12_ENET.1 C12_MCU.1 C12_PWR.2 C13_ENET.1 C13_MCU.1 C13_PWR.2 C14_ENET.1 C14_MCU.1 C14_PWR.2 C15_ENET.1 C15_MCU.1 C15_PWR.2 C16_MCU.1 C16_PWR.2 C17_MCU.1 C17_PWR.2 C18_MCU.1 C18_PWR.2 C19_MCU.1 C19_PWR.2 C20_PWR.2 C32.1 D2_MCU.1 D3_MCU.1 D4_MCU.1 FL1.17 J1_I2C.2 J1_MCU.5 J1_MCU.7 J1_PWR.2 J1_PWR.3 J2_I2C.2 J_BTN1.2 J_BTN2.2 J_BTN3.2 J_BTN4.2 J_BTN5.2 J_BTN6.2 J_BTN7.2 J_BTN8.2 J_CAN0.2 J_CAN1.2 J_SD1.6 J_SD1.S1 J_SD1.S2 J_SD1.S3 J_SD1.S4 Q_COIL1.2 Q_COIL2.2 Q_COIL3.2 Q_COIL4.2 Q_COIL5.2 Q_COIL6.2 Q_COIL7.2 Q_COIL8.2 R1_STP1.2 R1_STP2.2 R1_STP3.2 R1_STP4.2 R1_STP5.2 R1_STP6.2 R1_STP7.2 R1_STP8.2 R2_STP1.2 R2_STP2.2 R2_STP3.2 R2_STP4.2 R2_STP5.2 R2_STP6.2 R2_STP7.2 R2_STP8.2 R3_PWR.1 R4_PWR.1 R6_IP.1 R6_MCU.1 R8_MCU.1 R8_PWR.1 R9_PWR.1 R10_PWR.1 R12_ENET.1 R27_ENET.1 R28_ENET.1 R29_ENET.1 R30_ENET.1 R31_ENET.1 R32_ENET.1 R33_ENET.1 R34_ENET.1 R35_ENET.1 R36_ENET.1 TVS1_CAN0.3 TVS1_CAN1.3 U1.9 U1.18 U1.25 U1_CAN0.2 U1_CAN0.8 U1_CAN0.9 U1_CAN1.2 U1_CAN1.8 U1_CAN1.9 U1_ENET.33 U1_IP.5 U1_IP.11 U1_MCU.10 U1_MCU.19 U1_MCU.26 U1_MCU.49 U1_MCU.74 U1_MCU.99 U1_PRES.6 U1_PWR_LDO1.1 U1_PWR_LDO2.1 U2_PRES.6 U2_PWR.4 U2_STP1.3 U2_STP1.9 U2_STP1.10 U2_STP1.13 U2_STP1.18 U2_STP1.29 U2_STP2.3 U2_STP2.10 U2_STP2.13 U2_STP2.18 U2_STP2.29 U2_STP3.3 U2_STP3.9 U2_STP3.13 U2_STP3.18 U2_STP3.29 U2_STP4.3 U2_STP4.13 U2_STP4.18 U2_STP4.29 U2_STP5.3 U2_STP5.9 U2_STP5.10 U2_STP5.13 U2_STP5.18 U2_STP5.29 U2_STP6.3 U2_STP6.10 U2_STP6.13 U2_STP6.18 U2_STP6.29 U2_STP7.3 U2_STP7.9 U2_STP7.13 U2_STP7.18 U2_STP7.29 U2_STP8.3 U2_STP8.13 U2_STP8.18 U2_STP8.29 Y1_ENET.2 Y1_ENET.4 Y2_MCU.2 Y2_MCU.4 | length 206.4
  Top Layer w0.254: v1(41.4,26.1) U1_MCU.10@42.962,26.1 ; v1(41.8,21.6) U1_MCU.19@42.962,21.6 ; v1(44.7,15.7) U1_MCU.26@44.7,16.862 ; U1_MCU.99@45.2,32.338 v1(45.2,33.9) ; U1_MCU.49@56.2,16.862 56.223,16.839 56.223,16.077 v1(56.9,15.4) ; U1_MCU.74@58.438,30.1 58.461,30.123 59.223,30.123 v1(59.9,30.8) ; C15_ENET.1@69.8,36.5 71.03,36.5 71.09,36.559 v1(71.143,36.559)
  Bottom Layer w0.127: v1(72.656,34.344) 72.744,34.344 72.854,34.454 74.654,34.454 75.1,34.9 R32_ENET.1@75.1,35
  Bottom Layer w0.254: C1_STP5.1@11.5,42.5 v1(11.5,41.5) v1(13.1,39.9) v1(14.1,38.9) ; C1_STP1.1@11.5,57.2 v1(11.5,56.2) v1(13.1,54.6) v1(14.1,53.6) ; U2_STP5.18@11.677,38.9 v1(13.1,38.9) v1(14.1,38.9) ; U2_STP1.18@11.677,53.6 v1(13.1,53.6) v1(14.1,53.6) ; U2_STP5.13@13.1,36.477 v1(13.1,37.9) v1(14.1,38.9) ; U2_STP1.13@13.1,51.177 v1(13.1,52.6) v1(14.1,53.6) ; U2_STP5.10@14.6,36.477 U2_STP5.29@14.6,38.4 ; U2_STP1.10@14.6,51.177 U2_STP1.29@14.6,53.1 ; U2_STP5.9@15.1,36.477 v1(15.1,37.9) U2_STP5.29@14.6,38.4 ; U2_STP1.9@15.1,51.177 v1(15.1,52.6) U2_STP1.29@14.6,53.1 ; U2_STP5.3@16.523,39.4 U2_STP5.29@14.6,39.4 ; U2_STP1.3@16.523,54.1 U2_STP1.29@14.6,54.1 ; v1(16.7,43.5) C2_STP5.1@16.7,42.5 16.7,41.5 v1(15.1,39.9) U2_STP5.29@14.6,39.4 ; v1(16.7,58.2) C2_STP1.1@16.7,57.2 16.7,56.2 v1(15.1,54.6) U2_STP1.29@14.6,54.1 ; C1_STP6.1@24.4,42.5 v1(24.4,41.5) v1(26,39.9) v1(27,38.9) ; C1_STP2.1@24.4,57.2 v1(24.4,56.2) v1(26,54.6) v1(27,53.6) ; U2_STP6.18@24.577,38.9 v1(26,38.9) v1(27,38.9) ; U2_STP2.18@24.577,53.6 v1(26,53.6) v1(27,53.6) ; U2_STP6.13@26,36.477 v1(26,37.9) v1(27,38.9) ; U2_STP2.13@26,51.177 v1(26,52.6) v1(27,53.6) ; U2_STP6.10@27.5,36.477 U2_STP6.29@27.5,38.4 ; U2_STP2.10@27.5,51.177 U2_STP2.29@27.5,53.1 ; v1(28,37.9) U2_STP6.29@27.5,38.4 ; v1(28,52.6) U2_STP2.29@27.5,53.1 ; U2_STP6.3@29.423,39.4 U2_STP6.29@27.5,39.4 ; U2_STP2.3@29.423,54.1 U2_STP2.29@27.5,54.1 ; v1(29.6,43.5) C2_STP6.1@29.6,42.5 29.6,41.5 v1(28,39.9) U2_STP6.29@27.5,39.4 ; v1(29.6,58.2) C2_STP2.1@29.6,57.2 29.6,56.2 v1(28,54.6) U2_STP2.29@27.5,54.1 ; C1_STP7.1@37.3,42.5 v1(37.3,41.5) v1(38.9,39.9) v1(39.9,38.9) ; C1_STP3.1@37.3,57.2 v1(37.3,56.2) v1(38.9,54.6) v1(39.9,53.6) ; U2_STP7.18@37.477,38.9 v1(38.9,38.9) v1(39.9,38.9) ; U2_STP3.18@37.477,53.6 v1(38.9,53.6) v1(39.9,53.6) ; U2_STP7.13@38.9,36.477 v1(38.9,37.9) v1(39.9,38.9) ; U2_STP3.13@38.9,51.177 v1(38.9,52.6) v1(39.9,53.6) ; U2_STP7.9@40.9,36.477 v1(40.9,37.9) v1(39.9,38.9) ; U2_STP3.9@40.9,51.177 v1(40.9,52.6) v1(39.9,53.6) ; U2_STP7.3@42.323,39.4 U2_STP7.29@40.4,39.4 ; U2_STP3.3@42.323,54.1 U2_STP3.29@40.4,54.1 ; v1(42.5,43.5) C2_STP7.1@42.5,42.5 42.5,41.5 v1(40.9,39.9) U2_STP7.29@40.4,39.4 ; v1(42.5,58.2) C2_STP3.1@42.5,57.2 42.5,56.2 v1(40.9,54.6) U2_STP3.29@40.4,54.1 ; C1_STP8.1@50.2,42.5 v1(50.2,41.5) v1(51.8,39.9) v1(52.8,38.9) ; C1_STP4.1@50.2,57.2 v1(50.2,56.2) v1(51.8,54.6) v1(52.8,53.6) ; U2_STP8.18@50.377,38.9 v1(51.8,38.9) v1(52.8,38.9) ; U2_STP4.18@50.377,53.6 v1(51.8,53.6) v1(52.8,53.6) ; R10_PWR.1@51.375,24.775 v1(51.375,25.675) ; U2_STP8.13@51.8,36.477 v1(51.8,37.9) v1(52.8,38.9) ; U2_STP4.13@51.8,51.177 v1(51.8,52.6) v1(52.8,53.6) ; R9_PWR.1@53.375,24.775 v1(53.375,25.675) ; v1(53.8,37.9) v1(52.8,38.9) ; v1(53.8,52.6) v1(52.8,53.6) ; U2_STP8.3@55.223,39.4 U2_STP8.29@53.3,39.4 ; U2_STP4.3@55.223,54.1 U2_STP4.29@53.3,54.1 ; v1(55.4,43.5) C2_STP8.1@55.4,42.5 55.4,41.5 v1(53.8,39.9) U2_STP8.29@53.3,39.4 ; v1(55.4,58.2) C2_STP4.1@55.4,57.2 55.4,56.2 v1(53.8,54.6) U2_STP4.29@53.3,54.1 ; C1_BTN5.1@65.4,43.5 v1(66.3,43.5) ; C1_BTN1.1@65.4,49.1 v1(66.3,49.1) ; v1(67.4,18.3) FL1.17@69.4,18.3 v1(71.4,18.3) ; C1_BTN6.1@70.6,43.5 v1(71.5,43.5) ; C1_BTN2.1@70.6,49.1 v1(71.5,49.1) ; R34_ENET.1@70.7,37 70.7,36.9 70.798,36.802 70.896,36.802 71.139,36.559 v1(71.143,36.559) ; R30_ENET.1@72.3,35 72.398,34.902 72.398,34.602 v1(72.656,34.344) ; v1(74.877,32.6) R28_ENET.1@75.3,32.6 ; C1_BTN7.1@75.8,43.5 v1(76.7,43.5) ; C1_BTN3.1@75.8,49.1 v1(76.7,49.1) ; R31_ENET.1@76.7,30.7 77.753,30.7 77.953,30.5 v1(78,30.5) ; C1_BTN8.1@81,43.5 v1(81.9,43.5) ; C1_BTN4.1@81,49.1 v1(81.9,49.1) ; v1(14.1,38.9) U2_STP5.29@14.6,39.4 ; v1(14.1,38.9) U2_STP5.29@14.6,38.4 ; v1(14.1,53.6) U2_STP1.29@14.6,54.1 ; v1(14.1,53.6) U2_STP1.29@14.6,53.1 ; v1(27,38.9) U2_STP6.29@27.5,39.4 ; v1(27,38.9) U2_STP6.29@27.5,38.4 ; v1(27,53.6) U2_STP2.29@27.5,54.1 ; v1(27,53.6) U2_STP2.29@27.5,53.1 ; v1(39.9,38.9) U2_STP7.29@40.4,39.4 ; v1(39.9,53.6) U2_STP3.29@40.4,54.1 ; v1(52.8,38.9) U2_STP8.29@53.3,39.4 ; v1(52.8,53.6) U2_STP4.29@53.3,54.1
  Bottom Layer w0.5: R1_STP5.2@19.4,38.8 v1(19.4,39.55) R2_STP5.2@19.4,40.3 ; R1_STP1.2@19.4,53.5 v1(19.4,54.25) R2_STP1.2@19.4,55 ; R1_STP6.2@32.3,38.8 v1(32.3,39.55) R2_STP6.2@32.3,40.3 ; R1_STP2.2@32.3,53.5 v1(32.3,54.25) R2_STP2.2@32.3,55 ; R1_STP7.2@45.2,38.8 v1(45.2,39.55) R2_STP7.2@45.2,40.3 ; R1_STP3.2@45.2,53.5 v1(45.2,54.25) R2_STP3.2@45.2,55 ; R1_STP8.2@58.1,38.8 v1(58.1,39.55) R2_STP8.2@58.1,40.3 ; R1_STP4.2@58.1,53.5 v1(58.1,54.25) R2_STP4.2@58.1,55
  other v1: 41.2,1.9 37.2,6.7 41.2,7 36,7.7 37,9 41,9.3 24.9,11.1 25.7,11.1 28.3,11.2 29.6,11.5 22.7,12.7 23.7,12.7 29.6,12.7 37,14.1 24.709,14.627 65.3,30 66.6,30.5 69.9,31.1 65.1,31.8 66.5,32.7 72.8,32.9 69.7,33 65.1,34.1 66.8,34.7 66.3,36 65.1,36.7 14.1,37.9 27,37.9 39.9,37.9 52.8,37.9 15.1,38.9 28,38.9 40.9,38.9 53.8,38.9 14.1,39.9 27,39.9 39.9,39.9 52.8,39.9 14.1,52.6 27,52.6 39.9,52.6 52.8,52.6 62.8,53.286 68.9,53.286 75,53.286 81.1,53.286 61.9,53.3 68,53.3 74.1,53.3 80.2,53.3 15.1,53.6 28,53.6 40.9,53.6 53.8,53.6 61.9,54.2 68,54.2 74.1,54.2 80.2,54.2 14.1,54.6 27,54.6 39.9,54.6 52.8,54.6 62.8,58.986 68,59 68.9,58.985 74.1,59 75,58.986 80.2,59 81.1,58.986 68,59.9 74.1,59.9 80.2,59.9
I2C_MAIN.SCL: J1_I2C.3 J2_I2C.3 R3_MCU.1 U1.19 U1_MCU.79 | length 2.9
  Top Layer w0.254: U1_MCU.79@55.2,32.338 v1(55.2,33.9)
  Bottom Layer w0.127: R3_MCU.1@54.9,32.7 55,32.7 55.162,32.861 55.162,32.961 55.2,33 v1(55.2,33.9)
I2C_MAIN.SDA: J1_I2C.4 J2_I2C.4 R2_MCU.1 U1.20 U1_MCU.78 | length 2.1
  Top Layer w0.254: U1_MCU.78@55.7,32.338 v1(55.7,33.5)
  Bottom Layer w0.127: v1(55.7,33.5) 55.7,32.862 55.862,32.7 R2_MCU.1@55.9,32.7
IP_FLT_L: U1_IP.7
IP_GATE: Q1_IP.4 Q2_IP.4 R5_IP.2 U1_IP.10 | length 11.2
  Top Layer w0.254: v1(21.2,14.3) 21.6,13.9 U1_IP.10@21.6,13.625 ; Q1_IP.4@21.88,20.305 v1(21.88,21.1)
  L4 - Sig w0.254: v1(21.2,14.3) 21.2,20.42 v1(21.88,21.1)
  Bottom Layer w0.254: v1(21.2,14.3) 21.9,15 R5_IP.2@21.9,15.1 21.88,15.12 Q2_IP.4@21.88,16.495
IP_GATE_R: C5_IP.2 R5_IP.1 | length 1.1
  Bottom Layer w0.127: R5_IP.1@22.9,15.1 23.4,15.1 C5_IP.2@23.8,14.7
IP_ISNS_N: R1_IP.S2 U1_IP.8 | length 9.8
  Top Layer w0.127: v1(16.766,13.215) 16.3,13.681 16.3,15.3 16.5,15.5 21.3,15.5 22.6,14.2 U1_IP.8@22.6,13.625
IP_ISNS_P: R1_IP.S1 U1_IP.9 | length 6.2
  Top Layer w0.127: v1(16.766,14.985) 21.315,14.985 22.1,14.2 U1_IP.9@22.1,13.625
IP_OV: R4_IP.1 R6_IP.2 U1_IP.3 | length 2.9
  Top Layer w0.127: v1(22.5,10) 22.5,10.087 22.6,10.187 U1_IP.3@22.6,10.775
  Bottom Layer w0.127: v1(22.5,10) 22.549,10.049 22.549,10.285 22.802,10.538 22.838,10.538 23,10.7 23,11.5 22.8,11.7 R6_IP.2@22.7,11.7
IP_RETRY: C4_IP.2 U1_IP.4 | length 2.7
  Top Layer w0.127: v1(23.1,10) U1_IP.4@23.1,10.775
  Bottom Layer w0.127: v1(23.1,10) 23.7,10.6 C4_IP.2@23.7,11.7
IP_SHDN: R3_IP.1 U1_IP.6 | length 2.3
  Top Layer w0.127: v1(23,14.4) 23.062,14.338 23.241,14.338 23.538,14.041 23.538,13.687 U1_IP.6@23.6,13.625
  Bottom Layer w0.127: R3_IP.1@22.3,13.6 22.3,13.671 22.461,13.833 22.633,13.833 22.938,14.138 22.938,14.338 v1(23,14.4)
IP_SOURCE: Q1_IP.1 Q1_IP.2 Q1_IP.3 Q2_IP.1 Q2_IP.2 Q2_IP.3
  other v1: 23.1,16.495 21.88,17.765 23.1,17.765 21.88,19.035 23.1,19.035 23.1,20.305